# Altium PCB PCB1.PcbDoc
Units mm, origin at the board's own origin, x right, y up, seen from the top; angles counter-clockwise.
Board outline 115 x 120 mm, 2 copper layers (Top Layer, Bottom Layer); 89 components, 118 nets, 549 pads, 55 vias.
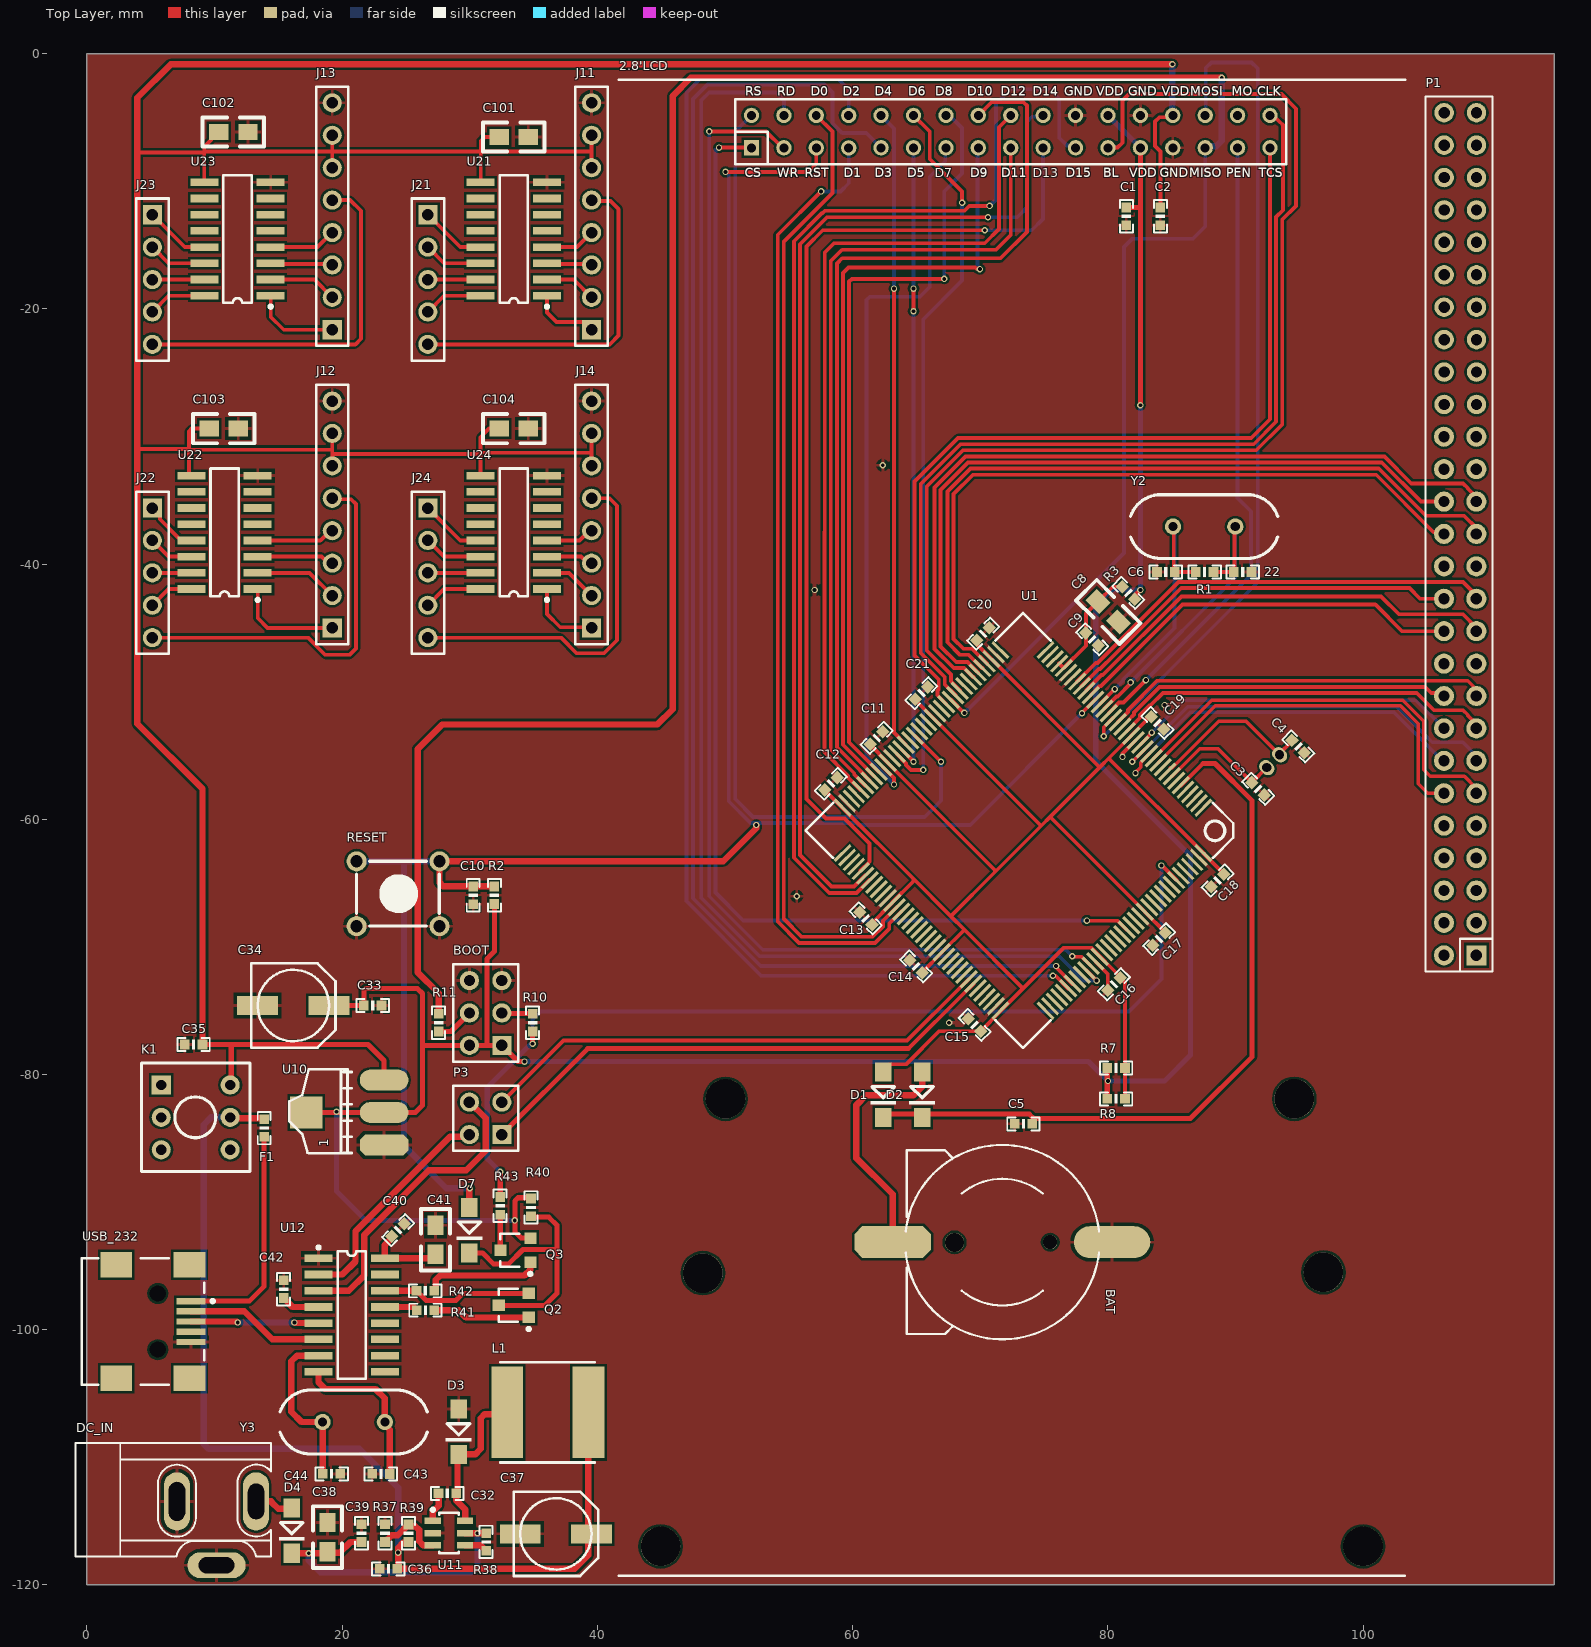
[diagram p0: Top Layer view]
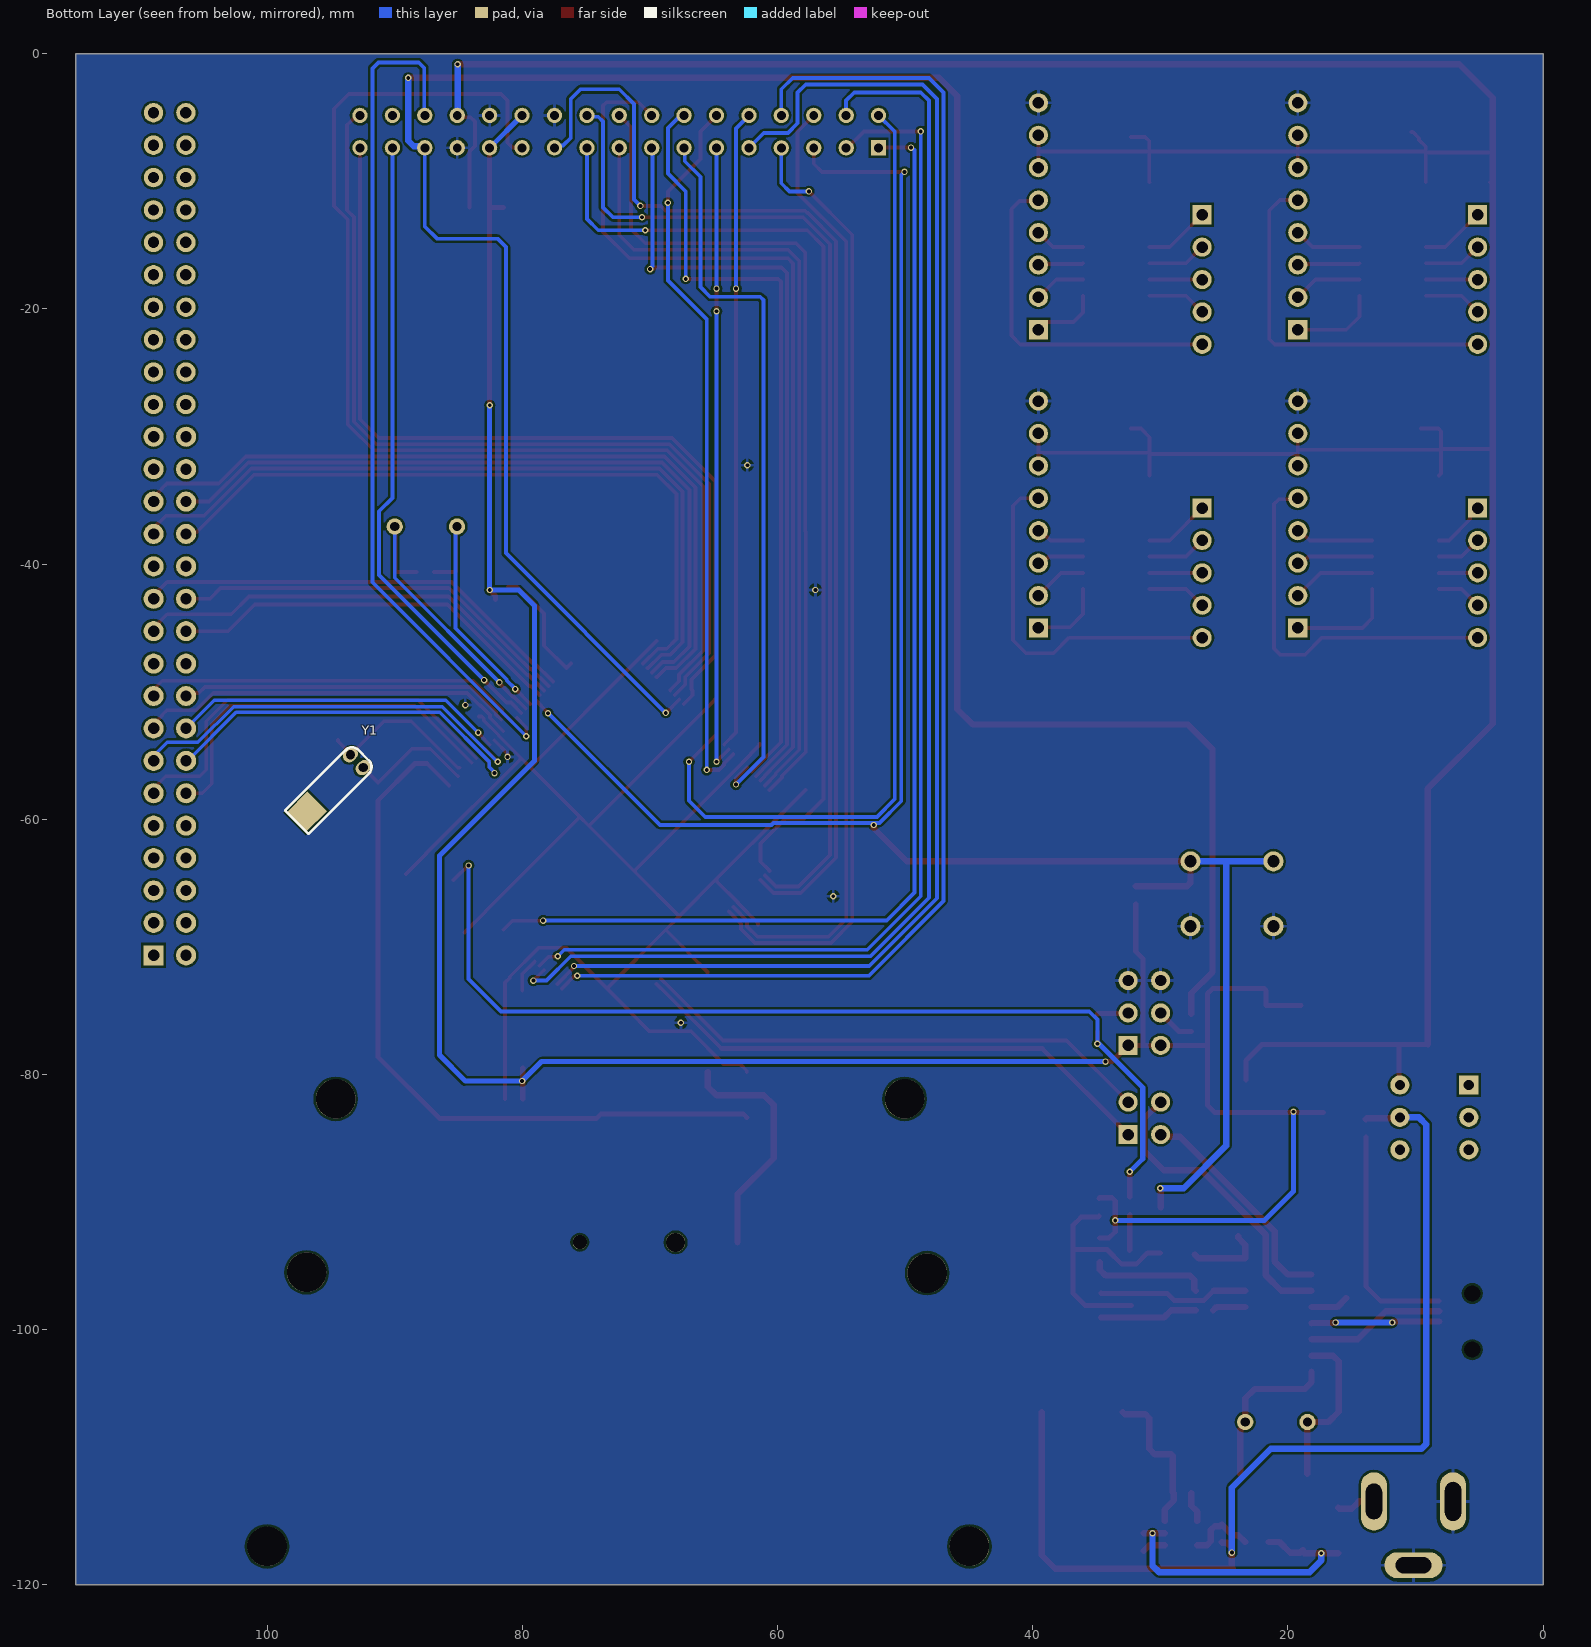
[diagram p1: Bottom Layer view, seen from below]

## Layer stack, top to bottom
Top Solder: solder mask 0.0102, Solder Resist, Dk 3.5
Top Layer: signal copper 0.0356
Dielectric 1: dielectric 0.32, FR-4, Dk 4.8
Bottom Layer: signal copper 0.0356
Bottom Solder: solder mask 0.0102, Solder Resist, Dk 3.5

## Board outline
0,-120 115,-120 115,0 0,0

## Design rules (kind name [scope] priority, off if disabled: settings)
Clearance [All] p1: gap=0.178 ignorepadtopadclearanceinfootprint=FALSE
ComponentClearance [All] p1: gap=0 collisioncheckmode=3 verticalgap=0 showdistances=FALSE
HoleSize [All] p1: absolutevalues=TRUE maxlimit=10 minlimit=0.025 maxpercent=80.000 minpercent=20.000
MinimumSolderMaskSliver [All] p1 off: minsoldermaskwidth=0.254
PolygonConnect [All] p1: connectstyle=Relief reliefconductorwidth=0.254 reliefentries=4 polygonreliefangle="90 Angle" airgapwidth=0.254
RoutingVias [All] p1: holewidth=0.3 width=0.5 viastyle="Through Hole" minholewidth=0.3 minwidth=0.5 maxholewidth=0.3 maxwidth=0.5
SilkToSilkClearance [All] p1 off: silktosilkclearance=0.254
SilkToSolderMaskClearance [IsPad] p1 off: minsilkscreentomaskgap=0.254 clearancetoexposedcopper=TRUE
SolderMaskExpansion [All] p1: expansion=0.102
Width [All] p1: maxlimit=0.5 minlimit=0.25 preferedwidth=0.3
25 further rules are at their usual default settings.

## Components (designator, comment, footprint, x,y, rotation, side; value= is the part's Value field where it differs from the comment)
2.8'LCD "TFT_LCD" db2*17-4.3 52.075,-7.39 r0 top
22 "10" 0603P 90.57,-40.62 r180 top
BAT "BATT" BATM 71.735,-93.143 r270 top
BOOT "Header 3X2" HDR2X3 32.512,-77.724 r90 top
C1 "104" 0603P 81.452,-12.752 r270 top
C2 "104" 0603P 84.119,-12.752 r270 top
C3 "10" 0603P 91.783,-57.618 r135 top
C4 "10" 0603P 94.926,-54.296 r135 top
C5 "104" 0603P 73.388,-83.87 r0 top
C6 "22" 0603P 84.538,-40.618 r0 top
C8 "10uF" 0805 80.839,-44.555 r135 top
C9 "104" 0603P 78.775,-45.901 r135 top
C10 "104" 0603P 30.271,-65.965 r270 top
C11 "104" 0603P 61.892,-53.624 r225 top
C12 "104" 0603P 58.3,-57.216 r225 top
C13 "104" 0603P 61.029,-67.765 r315 top
C14 "104" 0603P 64.98,-71.536 r315 top
C15 "104" 0603P 69.56,-76.116 r315 top
C16 "104" 0603P 80.481,-72.931 r45 top
C17 "104" 0603P 84.019,-69.393 r45 top
C18 "104" 0603P 88.607,-64.803 r45 top
C19 "104" 0603P 83.894,-52.456 r135 top
C20 "104" 0603P 70.231,-45.466 r225 top
C21 "104" 0603P 65.394,-50.121 r225 top
C32 "103" 0603P 28.239,-112.828 r0 top
C33 "104" 0603P 22.397,-74.601 r180 top
C34 "220uF" CC6.56.5 16.174,-74.601 r180 top
C35 "104" 0603P 8.351,-77.649 r0 top
C36 "104" 0603P 23.622,-118.745 r0 top
C37 "220uF" CC6.56.5 36.748,-116.003 r180 top
C38 "10uF" 0805 18.841,-117.4 r90 top
C39 "104" 0603P 21.508,-115.952 r90 top
C40 "104" 0603P 24.384,-92.202 r45 top
C41 "10uF" 0805 27.303,-94.107 r90 top
C42 "104" 0603P 15.412,-96.826 r270 top
C43 "22" 0603P 23.032,-111.304 r0 top
C44 "22" 0603P 19.171,-111.304 r180 top
C101 "0.1uF" 0805 34.589,-6.531 r180 top
C102 "0.1uF" 0805 12.618,-6.15 r180 top
C103 "0.1uF" 0805 11.856,-29.391 r180 top
C104 "0.1uF" 0805 34.589,-29.391 r180 top
D1 "1N4148" DIODE_SOP 62.402,-79.808 r270 top
D2 "1N4148" DIODE_SOP 65.45,-79.808 r270 top
D3 "SS14" DIODE_SOP 29.128,-106.224 r270 top
D4 "SS14" DIODE_SOP 16.047,-113.971 r270 top
D7 "1N4148" DIODE_SOP 29.972,-90.424 r270 top
DC_IN "POWER" DC10B 2.608,-117.781 r0 top
F1 "1000mA" 0603P 13.888,-84.202 r90 top
J11 "CON8" HDR1X8 39.542,-21.642 r90 top
J12 "CON8" HDR1X8 19.222,-45.01 r90 top
J13 "CON8" HDR1X8 19.222,-21.642 r90 top
J14 "CON8" HDR1X8 39.542,-45.01 r90 top
J21 "CON5" HDR1X5 26.715,-12.625 r270 top
J22 "CON5" HDR1X5 5.125,-35.612 r270 top
J23 "CON5" HDR1X5 5.125,-12.625 r270 top
J24 "CON5" HDR1X5 26.715,-35.612 r270 top
K1 "BUTTON" BTN8.5*8.5 5.821,-80.824 r0 top
L1 "4.7uH" L_SOP74 39.288,-106.478 r180 top
P1 "HEAD2*27" HEAD2*27 108.895,-70.675 r90 top
P3 "USART1" HDR2X2 32.512,-84.709 r90 top
Q2 "S8050" SOT-23R 33.573,-98.096 r90 top
Q3 "S8550" SOT-23R 33.7,-93.778 r90 top
R1 "1M" 0603P 87.586,-40.618 r0 top
R2 "10K" 0603P 31.922,-65.965 r90 top
R3 "10R" 0603P 81.605,-42.263 r315 top
R7 "0R" 0603P 80.645,-79.502 r0 top
R8 "0R" 0603P 80.645,-81.915 r0 top
R10 "10K" 0603P 34.925,-75.946 r90 top
R11 "10K" 0603P 27.559,-75.946 r90 top
R37 "9.53K" 0603P 23.35,-115.952 r90 top
R38 "100K" 0603P 31.287,-116.638 r270 top
R39 "49.9K" 0603P 25.191,-115.952 r270 top
R40 "10K" 0603P 34.798,-90.424 r90 top
R41 "1K" 0603P 26.525,-98.475 r0 top
R42 "1K" 0603P 26.512,-96.953 r0 top
R43 "1K" 0603P 32.385,-90.297 r270 top
RESET "KEY_M" KEY_M 21.127,-63.298 r0 top
U1 "STM32F103ZET6" LQFP144 87.49,-59.118 r225 top
U10 "AMS1117-3.3" AMS1117 23.284,-85.524 r90 top
U11 "MP2359" SOT-23-6 27.096,-114.992 r0 top
U12 "CH340G" SOP16M 20.746,-98.858 r270 top
U21 "ULN2003" SOP16M 33.446,-14.53 r90 top
U22 "ULN2003" SOP16M 10.78,-37.517 r90 top
U23 "ULN2003" SOP16M 11.796,-14.53 r90 top
U24 "ULN2003" SOP16M 33.446,-37.517 r90 top
USB_232 "USB" USB/SM0.8-6H5 0.299,-99.366 r180 top
Y1 "32.768K" XTAL32 92.458,-55.956 r315 bottom
Y2 "8MHz" XTAL_US 89.989,-37.064 r180 top
Y3 "8MHz" XTAL_US 18.46,-107.24 r0 top

## Footprints (in the part's own frame and the unit in brackets; to place one, negate y for a bottom-side part, rotate by r counter-clockwise, add the part's x,y. Pads: shape width x height; smd on the part's side, far side on the other; paste and mask are expansions set on the pad)
0603P [mil]
  rect 30x30 smd: 1(-27,0) 2(27.5,-0.06)
  silkscreen extent -50,-20 50,20
0805 [mil]
  rect 60x50 smd: 1(0,-0.06) 2(90,-0.06)
  silkscreen extent -50,-45 140,45
AMS1117 [mil]
  oct 65x150 smd: 1(0.03,-0.06)
  oval 65x150 smd: 2(100.03,-0.06) 3(200.03,-0.06)
  rect 100x100 smd: 4(100.03,239.94)
  silkscreen extent -26,100 234,293
BATM [mm]
  round 1.1 hole 1.1 unplated: 0(0,3.748)
  round 1.5 hole 1.5 unplated: 0(0.025,-3.752)
  oct 2.5x6 smd: 1(0,-8.602)
  oval 2.5x6 smd: 2(0,8.598)
  silkscreen extent -7.62,-7.58 7.62,7.57
BTN8.5*8.5 [mm]
  rect 1.5x1.5 hole 0.8: 1(0,0)
  round 1.5 hole 0.8: 2(0,-2.54) 3(0,-5.08) 4(5.4,-5.08) 5(5.4,-2.54) 6(5.4,0)
  silkscreen extent -1.55,-6.79 6.95,1.71
CC6.56.5 [mm]
  rect 3.2x1.5 smd: 1(-2.794,0) 2(2.8,0)
  silkscreen extent -3.3,-3.3 3.3,3.3
db2*17-4.3 [mm]
  rect 1.2x1.2 hole 0.7: 1(-0.002,0.006)
  round 1.2 hole 0.7: 2(-0.002,2.546) 3(2.538,0.006) 4(2.538,2.546) 5(5.08,0) 6(5.078,2.546) 7(7.62,0) 8(7.62,2.54) 9(10.158,0.006) 10(10.158,2.546) 11(12.698,0.006) 12(12.698,2.546) 13(15.238,0.006) 14(15.238,2.546) 15(17.778,0.006) 16(17.778,2.546) 17(20.318,0.006) 18(20.318,2.546) 19(22.858,0.006) 20(22.858,2.546) 21(25.398,0.006) 22(25.398,2.546) 23(27.938,0.006) 24(27.938,2.546) 25(30.478,0.006) 26(30.478,2.546) 27(33.018,0.006) 28(33.018,2.546) 29(35.558,0.006) 30(35.558,2.546) 31(38.098,0.006) 32(38.098,2.546) 33(40.638,0.006) 34(40.638,2.546)
  round 3.1 hole 3.1: ""(-7.125,-109.596) ""(-3.81,-88.18) ""(-2.037,-74.525) ""(42.54,-74.525) ""(44.82,-88.12) ""(47.925,-109.596)
  silkscreen extent -10.4,-111.89 51.25,5.33
DC10B [mil]
  oval 80x180 hole 50 slot 110 at 90 deg: 1(419.09,170)
  oval 80x180 hole 50 slot 120 at 90 deg: 2(175,170)
  oval 180x80 hole 50 slot 110 at 0 deg: 3(297.05,-26.85)
  silkscreen extent -138,0 465,350
DIODE_SOP [mm]
  rect 1.5x1.3 smd: 1(0,0) 2(3.556,0)
  silkscreen extent 1.14,-1.02 2.56,1.02
HDR1X5 [mm] "Connector; Header; 5 Position"
  rect 1.5x1.5 hole 0.9: 1(0,0)
  round 1.5 hole 0.9: 2(2.54,0) 3(5.08,0) 4(7.62,0) 5(10.16,0)
  silkscreen extent -1.27,-1.27 11.43,1.27
HDR1X8 [mm] "Connector; Header; 8 Position"
  rect 1.5x1.5 hole 0.9: 1(0,0)
  round 1.5 hole 0.9: 2(2.54,0) 3(5.08,0) 4(7.62,0) 5(10.16,0) 6(12.7,0) 7(15.24,0) 8(17.78,0)
  silkscreen extent -1.27,-1.27 19.05,1.27
HDR2X2 [mm]
  rect 1.5x1.5 hole 0.9: 1(0,0)
  round 1.5 hole 0.9: 2(0,2.54) 3(2.54,0) 4(2.54,2.54)
  silkscreen extent -1.27,-1.27 3.81,3.81
HDR2X3 [mm]
  rect 1.5x1.5 hole 0.889: 1(0,0)
  round 1.5 hole 0.889: 2(0,2.54) 3(2.54,0) 4(2.54,2.54) 5(5.08,0) 6(5.08,2.54)
  silkscreen extent -1.27,-1.27 6.35,3.81
HEAD2*27 [mil]
  rect 62x62 hole 35: 1(0.42,0.42)
  round 62 hole 35: 2(0.42,100.42) 3(100.42,0.42) 4(100.42,100.42) 5(200.42,0.42) 6(200.42,100.42) 7(300.42,0.42) 8(300.42,100.42) 9(400.42,0.42) 10(400.42,100.42) 11(500.42,0.42) 12(500.42,100.42) 13(600.42,0.42) 14(600.42,100.42) 15(700.42,0.42) 16(700.42,100.42) 17(800.42,0.42) 18(800.42,100.42) 19(900.42,0.42) 20(900.42,100.42) 21(1000.42,0.42) 22(1000.42,100.42) 23(1100.42,0.42) 24(1100.42,100.42) 25(1200.42,0.42) 26(1200.42,100.42) 27(1300.42,0.42) 28(1300.42,100.42) 29(1400.42,0.42) 30(1400.42,100.42) 31(1500.42,0.42) 32(1500.42,100.42) 33(1600.42,0.42) 34(1600.42,100.42)
  round 60 hole 35: 35(1700,0) 36(1700,100) 37(1800,0) 38(1800,100) 39(1900,0) 40(1900,100) 41(2000,0) 42(2000,100) 43(2100,0) 44(2100,100) 45(2200,0) 46(2200,100) 47(2300,0) 48(2300,100) 49(2400,0) 50(2400,100) 51(2500,0) 52(2500,100) 53(2600,0) 54(2600,100)
  silkscreen extent -50,-50 2650,157
KEY_M [mil]
  round 62 hole 38: 1(0,0) 1(255.91,0) 2(0,-200) 2(255.91,-200)
  silkscreen extent 0,-200 255,0
L_SOP74 [mm]
  rect 2.5x7.2 smd: 1(0,0) 2(6.35,0)
  silkscreen extent -0.51,-3.94 6.89,3.94
LQFP144 [mm]
  rect 1.8x0.254 smd: 1(-0.009,0.001) 2(-0.009,-0.499) 3(-0.009,-0.999) 4(-0.009,-1.499) 5(-0.009,-1.999) 6(-0.009,-2.499) 7(-0.009,-2.999) 8(-0.009,-3.499) 9(-0.009,-3.999) 10(-0.009,-4.499) 11(-0.009,-4.999) 12(-0.009,-5.499) 13(-0.009,-5.999) 14(-0.009,-6.499) 15(-0.009,-6.999) 16(-0.009,-7.499) 17(-0.009,-7.999) 18(-0.009,-8.499) 19(-0.009,-8.999) 20(-0.009,-9.499) 21(-0.009,-9.999) 22(-0.009,-10.499) 23(-0.009,-10.999) 24(-0.009,-11.499) 25(-0.009,-11.999) 26(-0.009,-12.499) 27(-0.009,-12.999) 28(-0.009,-13.499) 29(-0.009,-13.999) 30(-0.009,-14.499) 31(-0.009,-14.999) 32(-0.009,-15.499) 33(-0.009,-15.999) 34(-0.009,-16.499) 35(-0.009,-16.999) 36(-0.009,-17.499) 73(22.491,-17.499) 74(22.491,-16.999) 75(22.491,-16.499) 76(22.491,-15.999) 77(22.491,-15.499) 78(22.491,-14.999) 79(22.491,-14.499) 80(22.491,-13.999) 81(22.491,-13.499) 82(22.491,-12.999) 83(22.491,-12.499) 84(22.491,-11.999) 85(22.491,-11.499) 86(22.491,-10.999) 87(22.491,-10.499) 88(22.491,-9.999) 89(22.491,-9.499) 90(22.491,-8.999) 91(22.491,-8.499) 92(22.491,-7.999) 93(22.491,-7.499) 94(22.491,-6.999) 95(22.491,-6.499) 96(22.491,-5.999) 97(22.491,-5.499) 98(22.491,-4.999) 99(22.491,-4.499) 100(22.491,-3.999) 101(22.491,-3.499) 102(22.491,-2.999) 103(22.491,-2.499) 104(22.491,-1.999) 105(22.491,-1.499) 106(22.491,-0.999) 107(22.491,-0.499) 108(22.491,0.001)
  rect 0.254x1.8 smd: 37(2.491,-19.999) 38(2.991,-19.999) 39(3.491,-19.999) 40(3.991,-19.999) 41(4.491,-19.999) 42(4.991,-19.999) 43(5.491,-19.999) 44(5.991,-19.999) 45(6.491,-19.999) 46(6.991,-19.999) 47(7.491,-19.999) 48(7.991,-19.999) 49(8.491,-19.999) 50(8.991,-19.999) 51(9.491,-19.999) 52(9.991,-19.999) 53(10.491,-19.999) 54(10.991,-19.999) 55(11.491,-19.999) 56(11.991,-19.999) 57(12.491,-19.999) 58(12.991,-19.999) 59(13.491,-19.999) 60(13.991,-19.999) 61(14.491,-19.999) 62(14.991,-19.999) 63(15.491,-19.999) 64(15.991,-19.999) 65(16.491,-19.999) 66(16.991,-19.999) 67(17.491,-19.999) 68(17.991,-19.999) 69(18.491,-19.999) 70(18.991,-19.999) 71(19.491,-19.999) 72(19.991,-19.999) 109(19.991,2.501) 110(19.491,2.501) 111(18.991,2.501) 112(18.491,2.501) 113(17.991,2.501) 114(17.491,2.501) 115(16.991,2.501) 116(16.491,2.501) 117(15.991,2.501) 118(15.491,2.501) 119(14.991,2.501) 120(14.491,2.501) 121(13.991,2.501) 122(13.491,2.501) 123(12.991,2.501) 124(12.491,2.501) 125(11.991,2.501) 126(11.491,2.501) 127(10.991,2.501) 128(10.491,2.501) 129(9.991,2.501) 130(9.491,2.501) 131(8.991,2.501) 132(8.491,2.501) 133(7.991,2.501) 134(7.491,2.501) 135(6.991,2.501) 136(6.491,2.501) 137(5.991,2.501) 138(5.491,2.501) 139(4.991,2.501) 140(4.491,2.501) 141(3.991,2.501) 142(3.491,2.501) 143(2.991,2.501) 144(2.491,2.501)
  silkscreen extent -0.81,-20.8 23.29,3.3
SOP16M [mm]
  rect 0.6x2.2 smd: 1(-4.445,-2.6) 2(-3.175,-2.6) 3(-1.905,-2.6) 4(-0.635,-2.6) 5(0.635,-2.6) 6(1.905,-2.6) 7(3.175,-2.6) 8(4.445,-2.6) 9(4.445,2.6) 10(3.175,2.6) 11(1.905,2.6) 12(0.635,2.6) 13(-0.635,2.6) 14(-1.905,2.6) 15(-3.175,2.6) 16(-4.445,2.6)
  silkscreen extent -5.42,-2.72 5,1.1
SOT-23-6 [mil]
  rect 50x20 smd: 1(0,0) 2(0,-37.4) 3(0,-74.8) 4(100,-74.8) 5(100,-37.4) 6(100,0)
  silkscreen extent 0,-99 80,35
SOT-23R [mm]
  rect 0.9x0.95 smd: 1(0.95,-1.048) 2(-0.95,-1.048) 3(0,1.302)
  silkscreen extent -1.98,-1.17 1.3,1.3
USB/SM0.8-6H5 [mm]
  rect 2.3x0.5 smd: 1(-7.85,-1.6) 2(-7.85,-0.8) 3(-7.85,0) 4(-7.85,0.8) 5(-7.85,1.6)
  rect 2.5x2 smd: 6(-7.75,4.45) 7(-1.996,4.45) 8(-7.75,-4.45) 9(-1.996,-4.45)
  round 0.6 hole 1.27 unplated: MH1(-5.25,2.2) MH2(-5.25,-2.2)
  silkscreen extent -9.68,-4.95 0.7,4.95
XTAL32 [mil]
  oval 50x40 hole 28: 1(0,0) 2(0,-56)
  rect 92.13x86 smd: ""(220,-27)
  silkscreen extent -28,-77 264,25
XTAL_US [mil]
  round 50 hole 28: 1(0,0) 2(192.13,0)
  silkscreen extent -131,-98 323,98

## Part data
22 C3 C4 C6 C43 C44: library part C_1
BAT: library part BAT
BOOT: "Header, 3-Pin, Dual row", LatestRevisionDate=17-Jul-2002, LatestRevisionNote="Re-released for DXP Platform.", Publisher="Altium Limited"
C1 C2 C5 C9 C10 C11 C12 C13 C14 C15 C16 C17 C18 C19 C20 C21 C33 C35 C36 C39 C40 C42: library part C
C8 C38 C41 C101 C102 C103 C104: library part C_2
C32: library part C_3
C34 C37: library part CAP
D1 D2 D3 D4 D7: library part D
DC_IN: library part POW
F1 R1 R2 R10 R11 R37 R38 R39 R40 R41 R42 R43: library part R
J11 J12 J13 J14: library part "Header 8", "Header, 8-Pin", LatestRevisionDate=17-Jul-2002, LatestRevisionNote="Re-released for DXP Platform.", Publisher="Altium Limited"
J21 J22 J23 J24: library part "Header 5", "Header, 5-Pin", LatestRevisionDate=17-Jul-2002, LatestRevisionNote="Re-released for DXP Platform.", Publisher="Altium Limited"
L1: library part L_SOP
P3: library part "Header 2X2", "Header, 2-Pin, Dual row", LatestRevisionDate=17-Jul-2002, LatestRevisionNote="Re-released for DXP Platform.", Publisher="Altium Limited"
Q2: library part NPN, "8050/BCW846/BCW847"
Q3: library part PNP, "8550/BCW68"
R3: library part R_1
R7 R8: library part R_2
U10: library part AMS1117
U11: "DC DC Step Down IC"
U12: "USB2UART"
U21 U22 U23 U24: library part "Header 8X2A", "Header, 8-Pin, Dual row", LatestRevisionDate=17-Jul-2002, LatestRevisionNote="Re-released for DXP Platform.", Publisher="Altium Limited"
USB_232: library part USB5
Y1: library part XTAL_1, "Crystal Oscillator", LatestRevisionDate=17-Jul-2002, LatestRevisionNote="Re-released for DXP Platform.", Published=8-Jun-2000, Publisher="Altium Limited"
Y2 Y3: library part XTAL, "Crystal Oscillator", LatestRevisionDate=17-Jul-2002, LatestRevisionNote="Re-released for DXP Platform.", Published=8-Jun-2000, Publisher="Altium Limited"

## Via types
v1: diameter 0.5, hole 0.3, Top Layer to Bottom Layer, 55 vias

## Nets (pads, with @x,y where several pads share a name; then routed paths per layer and width w, separated by ;. In a path a pad name is that pad's centre, name@x,y a point inside that pad or via, vN(x,y) a via of type N, cw(c..) or ccw(c..) an arc to the next point about the centre after c; other vN are vias at no path point)
BOOT0: R10.1 R43.1 U1.138 | length 78
  Top Layer w0.3: v1(84.201,-63.627) 84.233,-63.627 U1.138
  Top Layer w0.4: R43.1 v1(32.385,-87.63) ; v1(34.925,-77.597) R10.1
  Bottom Layer w0.3: v1(34.925,-77.597) 34.925,-75.692 35.56,-75.057 81.661,-75.057 84.201,-72.517 v1(84.201,-63.627)
  Bottom Layer w0.4: v1(32.385,-87.63) 31.369,-86.614 31.369,-81.026 34.798,-77.597 v1(34.925,-77.597)
BOOT1: 2.8'LCD.29 R11.2 U1.48 | length 197.2
  Top Layer w0.3: U1.48 68.734,-51.664 v1(68.758,-51.664)
  Top Layer w0.5: R11.2 27.561,-73.636 25.908,-71.984 25.908,-54.508 27.838,-52.578 44.704,-52.578 45.898,-51.384 45.898,-3.327 47.32,-1.905 86.233,-1.905 86.258,-1.88 88.9,-1.88 v1(88.925,-1.905)
  Bottom Layer w0.3: v1(68.758,-51.664) 81.28,-39.141 81.28,-15.164 81.94,-14.503 86.69,-14.503 87.633,-13.561 2.8'LCD.29
  Bottom Layer w0.5: 2.8'LCD.29 87.767,-7.25 88.508,-7.25 88.925,-6.833 v1(88.925,-1.905)
CH340_D+: U12.5 USB_232.3 | length 10
  Top Layer w0.5: USB_232.3 11.736,-99.366 v1(11.811,-99.441) ; v1(16.256,-99.441) 16.296,-99.481 18.134,-99.481 U12.5
  Bottom Layer w0.5: v1(11.811,-99.441) v1(16.256,-99.441)
CH340_D-: U12.6 USB_232.2 | length 10.9
  Top Layer w0.5: USB_232.2 12.333,-98.566 14.53,-100.763 U12.6
FSMC_A10: 2.8'LCD.2 U1.56 | length 77.3
  Top Layer w0.3: U1.56 64.885,-53.455 v1(66.929,-55.499)
  Bottom Layer w0.3: 2.8'LCD.2 50.8,-6.117 50.8,-56.535 50.8,-58.42 52.197,-59.817 65.659,-59.817 66.929,-58.547 v1(66.929,-55.499)
FSMC_D0: 2.8'LCD.6 U1.85 | length 75.7
  Top Layer w0.3: 2.8'LCD.6 58.42,-6.111 58.42,-10.922 54.61,-14.732 54.61,-67.818 56.007,-69.215 61.569,-69.215 62.388,-68.395 62.388,-67.957 U1.85
FSMC_D1: 2.8'LCD.7 U1.86 | length 75.4
  Top Layer w0.3: v1(57.531,-10.795) 54.132,-14.194 54.132,-68.016 55.809,-69.693 61.766,-69.693 62.866,-68.593 62.866,-68.186 U1.86
  Bottom Layer w0.3: v1(57.531,-10.795) 59.055,-10.795 59.695,-10.155 2.8'LCD.7
FSMC_D2: 2.8'LCD.8 U1.114 | length 111.7
  Top Layer w0.3: v1(75.692,-72.263) 75.898,-72.263 U1.114
  Bottom Layer w0.3: 2.8'LCD.8 59.695,-2.799 58.801,-1.905 48.133,-1.905 46.99,-3.048 46.99,-66.421 52.832,-72.263 v1(75.692,-72.263)
FSMC_D3: 2.8'LCD.9 U1.115 | length 113.9
  Top Layer w0.3: v1(75.946,-71.501) 75.946,-71.604 U1.115
  Bottom Layer w0.3: 2.8'LCD.9 61.072,-6.223 59.182,-6.223 58.42,-5.461 58.42,-3.302 58.423,-3.299 58.423,-3.051 57.785,-2.413 48.641,-2.413 47.498,-3.556 47.498,-66.197 52.802,-71.501 v1(75.946,-71.501)
FSMC_D4: 2.8'LCD.10 U1.58 | length 50.1
  Top Layer w0.3: v1(63.246,-18.415) 63.246,-53.214 64.162,-54.13 U1.58
  Bottom Layer w0.3: 2.8'LCD.10 63.246,-5.857 v1(63.246,-18.415)
FSMC_D5: 2.8'LCD.11 U1.59 | length 49.5
  Top Layer w0.3: U1.59 64.77,-55.478 v1(64.77,-55.499) ; v1(64.77,-20.193) v1(64.77,-18.415)
  Bottom Layer w0.3: v1(64.77,-55.499) v1(64.77,-20.193) ; v1(64.77,-18.415) 64.771,-18.414 2.8'LCD.11 2.8'LCD.11
FSMC_D6: 2.8'LCD.12 U1.60 | length 56.8
  Top Layer w0.3: U1.60 63.455,-54.902 64.192,-55.64 64.192,-55.738 64.588,-56.134 v1(65.532,-56.134) ; 2.8'LCD.12 66.04,-6.111 66.04,-8.255 68.58,-10.795 v1(68.58,-11.684)
  Bottom Layer w0.3: v1(65.532,-56.134) 65.532,-20.828 68.58,-17.78 v1(68.58,-11.684)
FSMC_D7: 2.8'LCD.13 U1.63 | length 57.4
  Top Layer w0.3: U1.63 63.246,-56.782 v1(63.246,-57.277)
  Bottom Layer w0.3: v1(63.246,-57.277) 61.087,-55.118 61.087,-19.304 61.341,-19.05 65.278,-19.05 66.04,-18.288 66.04,-9.652 67.258,-8.434 67.258,-7.439 2.8'LCD.13
FSMC_D8: 2.8'LCD.14 U1.64 | length 61
  Top Layer w0.3: U1.64 62.041,-56.281 59.726,-53.967 59.726,-17.871 59.944,-17.653 v1(67.183,-17.653)
  Bottom Layer w0.3: v1(67.183,-17.653) 67.183,-10.795 68.58,-9.398 68.58,-5.842 67.564,-4.826 67.331,-4.826 2.8'LCD.14
FSMC_D9: 2.8'LCD.15 U1.65 | length 61
  Top Layer w0.3: U1.65 61.173,-56.123 61.173,-56.091 61.085,-56.003 61.085,-56.001 59.249,-54.165 59.249,-17.205 59.69,-16.764 69.596,-16.764 69.685,-16.853 69.939,-16.853 v1(69.977,-16.891)
  Bottom Layer w0.3: 2.8'LCD.15 69.78,-7.457 69.78,-16.64 69.977,-16.837 v1(69.977,-16.891)
FSMC_D10: 2.8'LCD.16 U1.66 | length 71.8
  Top Layer w0.3: U1.66 61.333,-56.96 60.607,-56.233 60.607,-56.199 58.771,-54.363 58.771,-16.454 59.182,-16.043 71.587,-16.043 73.66,-13.97 73.66,-4.064 73.406,-3.81 70.887,-3.81 2.8'LCD.16
FSMC_D11: 2.8'LCD.17 U1.67 | length 64
  Top Layer w0.3: U1.67 60.129,-56.494 60.129,-56.397 58.293,-54.561 58.293,-16.256 59.182,-15.367 71.247,-15.367 72.393,-14.221 2.8'LCD.17
FSMC_D12: 2.8'LCD.18 U1.68 | length 67
  Top Layer w0.3: U1.68 59.651,-56.723 59.651,-56.595 57.785,-54.729 57.785,-37.495 57.815,-37.465 57.815,-15.591 58.547,-14.859 70.358,-14.859 71.465,-13.752 71.465,-5.772 2.8'LCD.18
FSMC_D13: 2.8'LCD.19 U1.77 | length 77.1
  Top Layer w0.3: U1.77 60.626,-64.03 61.327,-63.329 61.327,-61.903 59.368,-59.944 57.912,-59.944 56.388,-58.42 56.388,-15.113 57.658,-13.843 v1(70.358,-13.843)
  Bottom Layer w0.3: v1(70.358,-13.843) 74.041,-13.843 74.933,-12.951 2.8'LCD.19
FSMC_D14: 2.8'LCD.20 U1.78 | length 81.5
  Top Layer w0.3: U1.78 60.117,-65.278 58.342,-65.278 55.88,-62.816 55.88,-14.945 57.998,-12.827 v1(70.612,-12.827)
  Bottom Layer w0.3: v1(70.612,-12.827) 72.898,-12.827 73.66,-12.065 73.66,-5.334 74.041,-4.953 74.824,-4.953 2.8'LCD.20
FSMC_D15: 2.8'LCD.21 U1.79 | length 90.9
  Top Layer w0.3: U1.79 60.317,-65.786 58.166,-65.786 55.402,-63.022 55.402,-14.702 57.615,-12.489 57.66,-12.489 57.831,-12.319 68.762,-12.319 69.143,-11.938 v1(70.739,-11.938)
  Bottom Layer w0.3: v1(70.739,-11.938) 71.247,-11.43 71.247,-3.937 72.39,-2.794 75.438,-2.794 76.2,-3.556 76.2,-6.604 76.808,-7.212 77.301,-7.212 2.8'LCD.21
FSMC_NE4: 2.8'LCD.1 U1.127 | length 94.6
  Top Layer w0.3: v1(49.53,-7.366) 52.055,-7.366 2.8'LCD.1 ; v1(78.359,-67.945) 78.372,-67.958 80.753,-67.958 81.453,-68.658 U1.127
  Bottom Layer w0.3: v1(49.53,-7.366) 49.476,-7.366 49.3,-7.542 49.246,-7.542 49.246,-65.756 51.435,-67.945 v1(78.359,-67.945)
FSMC_NOE: 2.8'LCD.4 U1.118 | length 105.5
  Top Layer w0.3: U1.118 78.317,-71.84 v1(79.121,-72.644)
  Bottom Layer w0.3: 2.8'LCD.4 54.613,-3.686 53.975,-3.048 48.768,-3.048 48.133,-3.683 48.133,-66.156 52.716,-70.739 76.2,-70.739 78.105,-72.644 v1(79.121,-72.644)
FSMC_NWE: 2.8'LCD.3 U1.119 | length 98.5
  Top Layer w0.3: v1(48.768,-6.096) 53.213,-6.096 54.501,-7.384 2.8'LCD.3 ; v1(77.216,-70.739) 77.254,-70.777 77.948,-70.777 U1.119
  Bottom Layer w0.3: v1(48.768,-6.096) 48.768,-66.04 52.959,-70.231 76.708,-70.231 v1(77.216,-70.739)
GND: 2.8'LCD.22 2.8'LCD.26 2.8'LCD.27 22.1 BAT.2 BOOT.5 BOOT.6 C1.2 C2.2 C3.1 C4.1 C5.1 C6.1 C8.1 C9.1 C10.2 C11.1 C12.1 C13.1 C14.1 C15.1 C16.1 C17.1 C18.1 C19.1 C20.1 C21.1 C33.1 C34.2 C35.1 C36.1 C37.2 C38.2 C39.2 C40.2 C41.2 C42.1 C43.1 C44.1 C101.1 C102.1 C103.1 C104.1 D3.1 DC_IN.2 DC_IN.3 J11.8 J12.8 J13.8 J14.8 R37.2 RESET.2 U1.16 U1.30 U1.31 U1.38 U1.51 U1.61 U1.71 U1.83 U1.94 U1.107 U1.120 U1.130 U1.143 U10.1 U11.2 U12.1 U21.8 U22.8 U23.8 U24.8 USB_232.5 | length 4.6
  Top Layer w0.3: v1(67.564,-75.946) v1@67.691,-75.946 ; U1.120 79.011,-71.137 79.996,-72.122 C16.1 ; v1(81.153,-55.118) 81.153,-54.849 U1.16
  other v1: 55.626,-66.04 84.455,-51.054 57.023,-42.037 62.357,-32.258
INT11: J11.1 U21.1 | length 5.4
  Top Layer w0.3: U21.1 36.046,-20.298 36.79,-21.042 38.942,-21.042 J11.1
INT12: J11.2 U21.2 | length 4.1
  Top Layer w0.3: U21.2 38.145,-17.705 J11.2
INT13: J11.3 U21.3 | length 3.5
  Top Layer w0.3: U21.3 36.109,-16.498 39.479,-16.498 J11.3
INT14: J11.4 U21.4 | length 4
  Top Layer w0.3: U21.4 38.399,-15.165 J11.4
INT21: J12.1 U22.1 | length 8.4
  Top Layer w0.3: U22.1 13.38,-44.241 14.149,-45.01 J12.1
INT22: J12.2 U22.2 | length 6.6
  Top Layer w0.3: U22.2 17.444,-40.692 J12.2
INT23: J12.3 U22.3 | length 6.1
  Top Layer w0.3: U22.3 18.389,-39.422 18.897,-39.93 J12.3
INT24: J12.4 U22.4 | length 6.2
  Top Layer w0.3: U22.4 18.287,-38.152 19.049,-37.39 J12.4
INT31: J13.1 U23.1 | length 6.9
  Top Layer w0.3: U23.1 14.396,-20.619 15.419,-21.642 J13.1
INT32: J13.2 U23.2 | length 5.4
  Top Layer w0.3: U23.2 17.825,-17.705 J13.2
INT33: J13.3 U23.3 | length 4.9
  Top Layer w0.3: U23.3 14.46,-16.498 19.159,-16.498 J13.3
INT34: J13.4 U23.4 | length 5.3
  Top Layer w0.3: U23.4 18.079,-15.165 J13.4
INT41: J14.1 U24.1 | length 5.9
  Top Layer w0.3: U24.1 36.046,-43.92 37.084,-44.958 39.49,-44.958 J14.1
INT42: J14.2 U24.2 | length 4.2
  Top Layer w0.3: U24.2 37.764,-40.692 J14.2
INT43: J14.3 U24.3 | length 3.7
  Top Layer w0.3: U24.3 38.709,-39.422 39.217,-39.93 J14.3
INT44: J14.4 U24.4 | length 3.8
  Top Layer w0.3: U24.4 38.607,-38.152 39.369,-37.39 J14.4
LCD_BL: 2.8'LCD.23 U1.46 | length 91
  Top Layer w0.3: U1.46 68.404,-49.887 67.701,-49.184 67.701,-48.651 65.816,-46.766 65.816,-33.92 68.647,-31.089 91.634,-31.089 93.669,-29.054 93.669,-13.011 94.742,-11.938 94.742,-4.318 93.599,-3.175 81.661,-3.175 81.153,-3.683 81.153,-6.985 80.772,-7.366 80.031,-7.366 2.8'LCD.23
Net22_2: 22.2 R1.2 U1.23 Y2.1 | length 23.8
  Top Layer w0.3: U1.23 80.669,-50.383 80.779,-50.383 81.788,-49.374 v1(81.788,-49.276) ; R1.2@88.285,-40.619 22.2 ; 22.2 89.931,-40.56 89.931,-37.123 Y2.1
  Bottom Layer w0.3: v1(81.788,-49.276) 89.989,-41.075 Y2.1
NetBAT_1: BAT.1 D2.1 | length 18.8
  Top Layer w0.5: BAT.1 63.133,-89.397 60.3,-86.563 60.3,-82.398 61.062,-81.636 64.77,-81.636 65.45,-80.956 D2.1
NetBOOT_3: BOOT.3 R10.2 | length 2.4
  Top Layer w0.4: BOOT.3 32.544,-75.216 34.895,-75.216 R10.2
NetBOOT_4: BOOT.4 R11.1 | length 3
  Top Layer w0.4: R11.1 28.524,-76.632 BOOT.4
NetC3_2: C3.2 U1.8 Y1.1 | length 9.9
  Top Layer w0.3: U1.8 85.054,-56.637 87.208,-54.483 88.646,-54.483 91.286,-57.123 C3.2 Y1.1
NetC4_2: C4.2 U1.9 Y1.2 | length 12.7
  Top Layer w0.3: U1.9@84.922,-55.966 85.05,-55.966 88.692,-52.324 90.838,-52.324 Y1.2 93.464,-54.86 94.434,-53.89 C4.2
NetC5_2: C5.2 D1.2 D2.2 U1.6 | length 58.7
  Top Layer w0.3: U1.6 86.586,-56.487 86.591,-56.487 87.452,-55.626
  Top Layer w0.4: D1.2 62.654,-83.112 73.841,-83.112 74.168,-83.439 86.487,-83.439 91.313,-78.613 91.313,-58.547 88.392,-55.626 87.452,-55.626
NetC6_2: C6.2 R1.1 U1.24 Y2.2 | length 21.7
  Top Layer w0.3: U1.24 v1(80.54,-49.806) ; Y2.2 85.173,-37.128 85.173,-40.557 C6.2 ; C6.2@85.237,-40.619 R1.1
  Bottom Layer w0.3: v1(80.54,-49.806) 81.21,-49.135 81.21,-49.037 85.217,-45.03 85.217,-37.172 Y2.2
NetC32_1: C32.1 U11.1 | length 2.4
  Top Layer w0.5: U11.1 27.096,-114.255 27.559,-113.792 27.559,-112.834 C32.1
NetC32_2: C32.2 D3.2 L1.2 U11.6 | length 12.2
  Top Layer w0.5: U11.6 29.636,-114.091 28.938,-113.393 C32.2 29.033,-112.734 29.033,-109.875 D3.2 30.428,-109.78 30.861,-109.347 30.861,-106.934 31.154,-106.641 32.775,-106.641 L1.2
NetC38_1: C38.1 C39.1 D4.2 R38.1 U11.5 | length 24.6
  Top Layer w0.5: D4.2 v1(17.381,-117.527) 18.716,-117.527 C38.1 18.843,-117.273 19.045,-117.475 19.812,-117.475 20.649,-116.638 C39.1 ; U11.5 29.64,-115.946 31.281,-115.946 R38.1
  Bottom Layer w0.5: v1(17.381,-117.527) 17.381,-118.092 18.288,-118.999 30.099,-118.999 30.607,-118.491 v1(30.607,-115.951)
NetC42_2: C42.2 U12.4 | length 3
  Top Layer w0.5: C42.2 16.109,-98.223 U12.4
NetC43_2: C43.2 U12.8 Y3.2 | length 12.6
  Top Layer w0.5: U12.8 18.146,-104.125 18.669,-104.648 22.606,-104.648 23.34,-105.382 Y3.2 23.34,-107.448 23.731,-107.839 C43.2
NetC44_2: C44.2 U12.7 Y3.1 | length 13.1
  Top Layer w0.5: U12.7 16.458,-102.033 16.002,-102.489 16.002,-106.426 16.816,-107.24 Y3.1 18.466,-107.246 18.466,-111.296 C44.2
NetD4_1: D4.1 DC_IN.1 | length 3.1
  Top Layer w0.5: DC_IN.1 14.446,-113.463 14.446,-113.506 14.986,-114.046 15.972,-114.046 D4.1
NetD7_2: D7.2 Q2.3 R40.1 | length 20.3
  Top Layer w0.4: D7.2 30.988,-93.98 31.877,-94.869 33.02,-94.869 34.163,-93.726 36.83,-93.726 ; Q2.3 35.889,-98.096 36.83,-97.155 36.83,-93.726 ; R40.1 34.874,-91.186 36.195,-91.186 36.83,-91.821 36.83,-93.726
NetQ2_1: Q2.1 R42.1 U12.14 | length 11.8
  Top Layer w0.4: R42.1 26.586,-97.713 28.906,-97.713 29.464,-97.155 34.612,-97.155 Q2.1
  Top Layer w0.5: U12.14 R42.1
NetQ2_2: Q2.2 R41.2 | length 7.6
  Top Layer w0.5: R41.2 29.135,-98.477 29.704,-99.046 Q2.2
NetQ3_2: Q3.2 R42.2 | length 9.2
  Top Layer w0.5: R42.2 27.341,-96.824 27.341,-96.103 27.686,-95.758 34.29,-95.758 34.734,-95.314 34.734,-94.742 Q3.2
NetQ3_3: Q3.3 R43.2 | length 2.8
  Top Layer w0.4: R43.2 32.391,-91.003 32.391,-93.771 Q3.3
NetR37_1: R37.1 R39.1 U11.3 | length 5.5
  Top Layer w0.5: R37.1 23.883,-116.105 24.353,-116.105 R39.1 25.322,-115.397 25.734,-115.397 26.033,-115.697 26.033,-116.584 26.337,-116.888 27.092,-116.888 U11.3 U11.3@27.092,-116.896
NetR38_2: R38.2 U11.4 | length 1.8
  Top Layer w0.5: U11.4 30.841,-116.892 R38.2
NetR41_1: R41.1 U12.13 | length 2.6
  Top Layer w0.5: U12.13 25.586,-98.223 R41.1
OUT11: J21.4 U21.16 | length 4.7
  Top Layer w0.3: J21.4 27.985,-18.975 U21.16
OUT12: J21.3 U21.15 | length 4.1
  Top Layer w0.3: J21.3 U21.15
OUT13: J21.2 U21.14 | length 4.7
  Top Layer w0.3: J21.2 27.985,-16.435 U21.14
OUT14: J21.1 U21.13 | length 5.2
  Top Layer w0.3: J21.1 29.255,-15.165 U21.13
OUT21: J22.4 U22.16 | length 3.6
  Top Layer w0.3: J22.4 6.395,-41.962 U22.16
OUT22: J22.3 U22.15 | length 3.1
  Top Layer w0.3: J22.3 U22.15
OUT23: J22.2 U22.14 | length 3.6
  Top Layer w0.3: J22.2 6.395,-39.422 U22.14
OUT24: J22.1 U22.13 | length 4.3
  Top Layer w0.3: J22.1 5.725,-36.212 5.725,-36.497 7.38,-38.152 U22.13
OUT31: J23.4 U23.16 | length 4.6
  Top Layer w0.3: J23.4 6.395,-18.975 U23.16
OUT32: J23.3 U23.15 | length 4.1
  Top Layer w0.3: J23.3 U23.15
OUT33: J23.2 U23.14 | length 4.6
  Top Layer w0.3: J23.2 6.395,-16.435 U23.14
OUT34: J23.1 U23.13 | length 5.1
  Top Layer w0.3: J23.1 7.665,-15.165 U23.13
OUT41: J24.4 U24.16 | length 4.7
  Top Layer w0.3: J24.4 27.985,-41.962 U24.16
OUT42: J24.3 U24.15 | length 4.1
  Top Layer w0.3: J24.3 U24.15
OUT43: J24.2 U24.14 | length 4.7
  Top Layer w0.3: J24.2 27.985,-39.422 U24.14
OUT44: J24.1 U24.13 | length 5.2
  Top Layer w0.3: J24.1 29.255,-38.152 U24.13
PA4: P1.28 U1.40 | length 55.7
  Top Layer w0.3: U1.40 69.366,-46.639 68.677,-46.639 67.915,-45.877 67.915,-34.524 69.438,-33 101.032,-33 105.537,-37.506 106.206,-37.506 P1.28
PA5: P1.27 U1.41 | length 60
  Top Layer w0.3: U1.41 70.141,-48.152 69.106,-47.117 68.423,-47.117 67.437,-46.131 67.437,-34.326 69.24,-32.523 101.23,-32.523 104.926,-36.219 107.926,-36.219 108.884,-37.177 P1.27
PA6: P1.30 U1.42 | length 57.6
  Top Layer w0.3: U1.42 68.994,-47.681 68.128,-47.681 66.899,-46.452 66.899,-34.188 69.042,-32.045 101.473,-32.045 104.532,-35.104 P1.30
PA7: P1.29 U1.43 | length 61.8
  Top Layer w0.3: U1.43 69.433,-48.859 68.732,-48.159 67.93,-48.159 66.421,-46.65 66.421,-33.99 68.845,-31.567 101.671,-31.567 103.783,-33.679 107.847,-33.679 108.204,-34.036 108.204,-34.079 108.884,-34.759 P1.29
PA9: P3.3 U1.101 | length 40.6
  Top Layer w0.3: P3.3 37.338,-77.343 64.277,-77.343 68.496,-73.124 68.503,-73.124 69.079,-72.547 U1.101
PA10: P3.1 U1.102 | length 41.8
  Top Layer w0.3: 64.388,-77.978 68.715,-73.651 U1.102
  Top Layer w0.4: P3.1 39.243,-77.978 64.388,-77.978
PC0: P1.22 U1.26 | length 31.5
  Top Layer w0.3: U1.26 78.658,-50.242 79.327,-49.573 79.459,-49.573 85.852,-43.18 100.965,-43.18 103.049,-45.264 P1.22
PC1: P1.21 U1.27 | length 34.9
  Top Layer w0.3: U1.27 79.516,-48.708 79.603,-48.708 85.766,-42.545 101.409,-42.545 102.806,-43.942 107.823,-43.942 108.884,-45.003 P1.21
PC2: P1.24 U1.28 | length 31.9
  Top Layer w0.3: U1.28 79.287,-48.23 79.381,-48.23 79.859,-47.752 79.883,-47.752 85.755,-41.88 103.632,-41.88 104.476,-42.724 P1.24
PC3: P1.23 U1.29 | length 35.2
  Top Layer w0.3: U1.29 79.058,-47.752 79.183,-47.752 85.533,-41.402 107.823,-41.402 108.884,-42.463 P1.23
PF0: U1.10
PF1: P1.12 U1.11 | length 29.8
  Top Layer w0.27: U1.11 88.417,-51.121 102.939,-51.121 104.327,-52.509 104.327,-57.21 105.081,-57.964 P1.12
PF2: P1.11 U1.12 | length 32.6
  Top Layer w0.27: U1.12 88.157,-50.673 103.124,-50.673 104.775,-52.324 104.775,-56.134 105.283,-56.642 107.95,-56.642 108.884,-57.576 P1.11
PF3: P1.14 U1.13 | length 30
  Top Layer w0.27: v1(82.169,-56.388) 82.169,-56.326 82.568,-55.927 82.568,-55.566 83.254,-54.881 U1.13
  Bottom Layer w0.27: v1(82.169,-56.388) 82.169,-56.326 82.566,-55.929 82.566,-55.515 86.452,-51.629 102.431,-51.629 106.226,-55.424 P1.14
PF4: P1.13 U1.14 | length 32.1
  Top Layer w0.27: v1(81.915,-55.499) 81.917,-55.499 U1.14
  Bottom Layer w0.27: v1(81.915,-55.499) 81.949,-55.499 86.267,-51.181 102.616,-51.181 105.419,-53.984 107.832,-53.984 108.884,-55.036 P1.13
PF5: P1.16 U1.15 | length 26.2
  Top Layer w0.27: U1.15 82.547,-54.151 v1@83.335,-53.363 ; v1@83.341,-53.369 83.439,-53.27 v1(83.439,-53.213)
  Bottom Layer w0.27: v1(83.439,-53.213) 85.979,-50.673 104.14,-50.673 106.344,-52.877 P1.16
PF6: P1.15 U1.18 | length 30.2
  Top Layer w0.3: U1.18 82.534,-52.054 82.534,-51.825 83.265,-51.095 83.328,-51.095 84.318,-50.105 104.207,-50.105 105.561,-51.459 107.847,-51.459 108.204,-51.816 108.204,-51.859 108.884,-52.539 P1.15
PF7: P1.18 U1.19 | length 26.2
  Top Layer w0.3: U1.19@81.646,-52.202 82.056,-51.792 82.056,-51.628 84.057,-49.627 104.872,-49.627 105.345,-50.1 106.1,-50.1 P1.18
PF8: P1.17 U1.20 | length 30.3
  Top Layer w0.3: U1.20 U1.20 81.579,-51.594 81.579,-51.43 83.859,-49.149 108.204,-49.149 108.64,-49.585 108.64,-50.1 P1.17
RESET: 2.8'LCD.5 C10.1 D7.1 R2.2 RESET.1 U1.25 | length 160.7
  Top Layer w0.3: v1(50.038,-9.271) 56.515,-9.271 57.15,-8.636 57.15,-7.395 2.8'LCD.5 ; v1(77.978,-51.689) 77.978,-51.66 U1.25
  Top Layer w0.5: D7.1 29.972,-88.951 v1(29.997,-88.925) ; R2.2 27.928,-65.266 27.627,-64.965 27.627,-63.298 49.859,-63.298 52.451,-60.706 v1(52.451,-60.452)
  Bottom Layer w0.3: v1(50.038,-9.271) 50.292,-9.525 50.292,-58.588 51.999,-60.295 60.295,-60.295 60.452,-60.452 69.215,-60.452 v1(77.978,-51.689)
  Bottom Layer w0.5: RESET.1@21.127,-63.298 27.627,-63.298 RESET.1@27.527,-63.398 ; 24.841,-63.398 24.841,-85.598 28.169,-88.925 v1(29.997,-88.925)
RXD: P3.4 U12.3 | length 23.8
  Top Layer w0.5: U12.3 20.522,-96.953 21.717,-95.758 21.717,-92.583 26.797,-87.503 29.718,-87.503 31.242,-85.979 31.242,-83.439 P3.4
T_CS: 2.8'LCD.33 U1.49 | length 69.7
  Top Layer w0.3: U1.49 67.338,-50.981 66.643,-50.286 66.643,-49.925 66.746,-49.823 66.746,-49.047 64.861,-47.162 64.861,-33.524 68.251,-30.134 91.238,-30.134 92.713,-28.658 2.8'LCD.33
T_MOSI: 2.8'LCD.30 U1.21 | length 67.3
  Top Layer w0.3: v1(79.68,-53.492) 79.68,-52.787 U1.21
  Bottom Layer w0.3: v1(79.68,-53.492) 91.745,-41.427 91.745,-35.803 91.745,-1.168 91.262,-0.686 88.113,-0.686 87.681,-1.118 87.681,-4.796 2.8'LCD.30
T_PEN: 2.8'LCD.31 U1.22 | length 49.5
  Top Layer w0.3: U1.22 80.072,-51.678 80.889,-50.861 81.219,-50.861 v1(82.982,-49.098)
  Bottom Layer w0.3: v1(82.982,-49.098) 91.211,-40.869 91.211,-35.865 90.173,-34.826 2.8'LCD.31
T_SCK: 2.8'LCD.34 U1.47 | length 72.4
  Top Layer w0.3: U1.47 68.051,-50.271 67.224,-49.444 67.224,-48.849 65.338,-46.964 65.338,-33.722 68.449,-30.611 91.436,-30.611 93.191,-28.856 93.191,-12.813 93.726,-12.278 93.726,-5.588 93.514,-5.376 93.488,-5.376 92.957,-4.844 2.8'LCD.34
TXD: P3.2 U12.2 | length 17.8
  Top Layer w0.5: U12.2 20.014,-95.683 21.039,-94.658 21.039,-92.302 28.472,-84.869 29.812,-84.869 P3.2
VBTN: C36.2 C37.1 F1.2 K1.5 L1.1 R39.2 | length 81.2
  Top Layer w0.5: K1.5 11.291,-83.434 13.82,-83.434 F1.2 ; C36.2@24.303,-118.745 24.384,-118.664 v1(24.384,-117.475) 24.384,-117.094 24.765,-116.713 25.127,-116.713 R39.2 ; C36.2@24.429,-118.797 24.371,-118.797 C36.2 38.225,-118.747 39.288,-117.684 L1.1
  Bottom Layer w0.5: K1.5 11.215,-83.37 9.721,-83.37 9.144,-83.947 9.144,-108.966 9.525,-109.347 21.336,-109.347 24.384,-112.395 v1(24.384,-117.475)
VCC: C40.1 C41.1 U12.16 | length 6
  Top Layer w0.5: C40.1 23.899,-92.81 23.346,-93.363 U12.16 26.999,-94.413 C41.1
VCC3.3: 2.8'LCD.24 2.8'LCD.25 BOOT.1 BOOT.2 C1.1 C33.2 C34.1 Q3.1 R2.1 R3.2 R7.1 R8.1 R40.2 U10.2 U10.4 | length 211.7
  Top Layer w0.4: U10.4 U10.2 25.729,-82.983 26.289,-82.423 26.289,-77.724 ; C34.1 18.97,-74.599 C33.2 21.699,-73.424 21.844,-73.279 25.908,-73.279 26.289,-73.66 26.289,-77.724 ; R2.1 31.922,-70.364 31.344,-70.942 31.344,-77.622 31.242,-77.724 ; v1(34.29,-78.994) 33.782,-78.994 BOOT.1 31.242,-77.724 ; Q3.1 34.027,-92.828 33.528,-92.329 v1(33.528,-91.44) 33.528,-89.916 33.782,-89.662 34.736,-89.662 R40.2 ; R8.1 R7.1 ; C1.1 82.549,-12.066 82.55,-12.065 ; R3.2 82.098,-42.516 82.55,-42.064 v1(82.55,-42.037) ; v1(82.55,-27.559) 82.55,-12.065 ; 2.8'LCD.25 82.55,-7.387 82.55,-12.065 ; 26.289,-77.724 BOOT.2 31.242,-77.724
  Bottom Layer w0.4: v1(19.558,-82.931) 19.558,-89.154 21.844,-91.44 v1(33.528,-91.44) ; v1(34.29,-78.994) 78.486,-78.994 v1(80.01,-80.518) 84.455,-80.518 86.487,-78.486 86.487,-62.865 79.052,-55.43 79.052,-43.249 80.264,-42.037 v1(82.55,-42.037) v1(82.55,-27.559) ; 2.8'LCD.24 2.8'LCD.25
VCC3.3M: C11.2 C12.2 C13.2 C14.2 C15.2 C16.2 C17.2 C18.2 C19.2 C20.2 C21.2 D1.1 R7.2 R8.2 U1.17 U1.39 U1.52 U1.62 U1.72 U1.84 U1.95 U1.108 U1.121 U1.131 U1.144 | length 155.2
  Top Layer w0.3: C12.2 57.807,-57.709 59.21,-59.112 U1.72 64.756,-64.657 ; C11.2 61.397,-54.194 62.748,-55.544 U1.62 71.14,-63.969 71.14,-64.155 ; C13.2 61.522,-68.148 63.101,-66.568 U1.84 64.756,-64.882 64.756,-64.657 ; D1.1 62.402,-79.708 62.902,-79.208 64.186,-79.208 66.783,-76.611 C15.2 70.053,-76.584 71.586,-75.05 U1.108 73.431,-73.177 ; C21.2 64.899,-50.636 66.283,-52.02 U1.52 74.714,-60.472 74.823,-60.472 ; C14.2 65.473,-71.976 66.99,-70.459 U1.95 68.757,-68.659 68.757,-68.657 ; C20.2@69.479,-46.034 69.479,-46.04 70.879,-47.44 U1.39 79.334,-55.9 79.395,-55.9 ; R8.2 R7.2 81.343,-72.806 C16.2 80.976,-72.34 78.715,-70.079 76.53,-70.079 73.431,-73.177 ; C19.2 83.167,-51.961 83.012,-52.116 83.012,-52.252 81.839,-53.424 U1.17 80.157,-55.138 ; C17.2 84.514,-68.879 82.9,-67.265 U1.131 75.493,-59.837 75.458,-59.837 ; C18.2 89.102,-64.282 87.496,-62.676 U1.144 80.157,-55.308 80.157,-55.138 ; 64.756,-64.657 67.677,-67.578 ; 67.677,-67.578 68.757,-68.657 ; 67.677,-67.578 67.717,-67.578 71.14,-64.155 ; 68.757,-68.657 73.277,-73.177 73.431,-73.177 ; 71.14,-64.155 74.823,-60.472 ; 74.823,-60.472 75.458,-59.837 ; 75.458,-59.837 79.395,-55.9 ; 79.395,-55.9 80.157,-55.138
VCC5: 2.8'LCD.28 C2.1 C35.2 C101.2 C102.2 C103.2 C104.2 J11.6 J11.7 J12.6 J12.7 J13.6 J13.7 J14.6 J14.7 K1.6 U10.3 U21.9 U22.9 U23.9 U24.9 | length 291.8
  Top Layer w0.3: 3.947,-30.988 8.001,-30.988 ; 3.947,-10.302 4.164,-10.085 ; 3.947,-7.544 4.15,-7.747 9.196,-7.747 ; U22.9 8.151,-33.072 8.001,-32.922 8.001,-30.988 ; U23.9 9.196,-7.747 ; C103.2 8.203,-29.389 8.001,-29.591 8.001,-30.988 ; C102.2 10.205,-6.148 9.72,-6.633 9.72,-6.76 9.196,-7.284 9.196,-7.747 ; J12.6 19.222,-31.369 ; J13.6 19.222,-7.672 ; J13.7 19.222,-7.672 ; J12.7@19.401,-29.591 J12.7 19.222,-31.04 ; U24.9 30.846,-31.369 19.222,-31.369 ; U21.9 30.861,-10.07 30.861,-7.672 ; C104.2 31.519,-29.389 30.846,-30.061 30.846,-31.287 39.46,-31.287 39.542,-31.369 ; C101.2 31.19,-6.529 30.861,-6.858 30.861,-7.672 ; J14.6 39.542,-31.369 ; J14.7 39.542,-31.369 ; J11.6 39.542,-7.672 ; J11.7 39.542,-7.672 ; C2.1 84.119,-7.665 83.693,-7.239 83.693,-5.334 84.043,-4.984 84.953,-4.984 2.8'LCD.28 ; 8.001,-30.988 8.053,-31.04 19.222,-31.04 ; 9.196,-7.747 9.271,-7.672 18.669,-7.672 19.222,-7.672 ; 19.222,-31.369 19.222,-31.04 ; 19.222,-7.672 30.861,-7.672 ; 30.861,-7.672 39.542,-7.672
  Top Layer w0.4: C35.2 11.303,-77.651 ; K1.6 11.303,-80.742 11.303,-77.651 ; U10.3 23.286,-78.912 22.025,-77.651 11.303,-77.651
  Top Layer w0.5: C35.2 9.049,-57.614 3.947,-52.512 3.947,-30.988 3.947,-10.302 3.947,-7.544 3.947,-3.47 6.579,-0.838 v1(85.065,-0.838)
  Bottom Layer w0.5: v1(85.065,-0.838) 85.065,-4.816 2.8'LCD.28
VDDA: C8.2 C9.2 R3.1 U1.32 U1.33 | length 9.2
  Top Layer w0.3: U1.33 U1.32 78.282,-46.406 C9.2 78.282,-43.879 C8.2 80.383,-41.778 R3.1
VM1: J11.5 J21.5 | length 27.5
  Top Layer w0.3: J21.5 40.969,-22.785 41.656,-22.098 41.656,-12.192 41.021,-11.557 39.617,-11.557 J11.5
VM2: J12.5 J22.5 | length 30.1
  Top Layer w0.3: J22.5 17.324,-45.772 18.669,-47.117 20.574,-47.117 21.082,-46.609 21.082,-35.306 20.701,-34.925 19.297,-34.925 J12.5
VM3: J13.5 J23.5 | length 29.1
  Top Layer w0.3: J23.5 21.03,-22.785 21.463,-22.352 21.463,-12.319 20.626,-11.482 J13.5
VM4: J14.5 J24.5 | length 28.5
  Top Layer w0.3: J24.5 37.136,-45.772 38.354,-46.99 40.513,-46.99 41.529,-45.974 41.529,-35.433 40.946,-34.85 J14.5
VUSB: F1.1 USB_232.1 | length 17.9
  Top Layer w0.4: USB_232.1 12.724,-97.766 13.888,-96.602 F1.1
pads on no net: 2.8'LCD. 2.8'LCD.32 BAT.0 K1.1 K1.2 K1.3 K1.4 P1.1 P1.2 P1.3 P1.4 P1.5 P1.6 P1.7 P1.8 P1.9 P1.10 P1.19 P1.20 P1.25 P1.26 P1.31 P1.32 P1.33 P1.34 P1.35 P1.36 P1.37 P1.38 P1.39 P1.40 P1.41 P1.42 P1.43 P1.44 P1.45 P1.46 P1.47 P1.48 P1.49 P1.50 P1.51 P1.52 P1.53 P1.54 U1.1 U1.2 U1.3 U1.4 U1.5 U1.7 U1.34 U1.35 U1.36 U1.37 U1.44 U1.45 U1.50 U1.53 U1.54 U1.55 U1.57 U1.69 U1.70 U1.73 U1.74 U1.75 U1.76 U1.80 U1.81 U1.82 U1.87 U1.88 U1.89 U1.90 U1.91 U1.92 U1.93 U1.96 U1.97 U1.98 U1.99 U1.100 U1.103 U1.104 U1.105 U1.106 U1.109 U1.110 U1.111 U1.112 U1.113 U1.116 U1.117 U1.122 U1.123 U1.124 U1.125 U1.126 U1.128 U1.129 U1.132 U1.133 U1.134 U1.135 U1.136 U1.137 U1.139 U1.140 U1.141 U1.142 U12.9 U12.10 U12.11 U12.12 U12.15 U21.5 U21.6 U21.7 U21.10 U21.11 U21.12 U22.5 U22.6 U22.7 U22.10 U22.11 U22.12 U23.5 U23.6 U23.7 U23.10 U23.11 U23.12 U24.5 U24.6 U24.7 U24.10 U24.11 U24.12 USB_232.4 USB_232.6 USB_232.7 USB_232.8 USB_232.9 USB_232.MH1 USB_232.MH2 Y1.

## Polygon pours and split planes (outlines as drawn)
GND on Top Layer "Top Layer-No Net" (solid, pour order 8): 0,0 115,0 115,-120 0,-120
GND on Bottom Layer "Top Layer-No Net" (solid, pour order 10): 0,0 115,0 115,-120 0,-120

## Silkscreen, mask and mechanical layers (free items; w line width, h text height)
Mechanical 1:
  the board outline again, w0.254

## Text inside footprints (layer, text, board x,y; h text height)
2.8'LCD: Top Overlay "D7" at 66.426,-9.676 h0.71; Top Overlay "BL" at 79.634,-9.676 h0.71; Top Overlay "MISO" at 86.365,-9.676 h0.71; Top Overlay "TCS" at 91.826,-9.676 h0.71; Top Overlay "MO" at 89.725,-3.29 h0.71; Top Overlay "MOSI" at 86.475,-3.29 h0.71; Top Overlay "CLK" at 91.725,-3.29 h0.71; Top Overlay "PEN" at 89.286,-9.676 h0.71; Top Overlay "D11" at 71.633,-9.676 h0.71; Top Overlay "GND" at 84.079,-9.676 h0.71; Top Overlay "GND" at 76.6,-3.29 h0.71; Top Overlay "RD" at 54.1,-3.29 h0.71; Top Overlay "D0" at 56.725,-3.29 h0.71; Top Overlay "D10" at 68.975,-3.29 h0.71; Top Overlay "VDD" at 79.1,-3.29 h0.71; Top Overlay "GND" at 81.6,-3.29 h0.71; Top Overlay "VDD" at 84.225,-3.29 h0.71; Top Overlay "VDD" at 81.666,-9.676 h0.71; Top Overlay "D15" at 76.713,-9.676 h0.71; Top Overlay "D12" at 71.6,-3.29 h0.71; Top Overlay "D13" at 74.1,-9.686 h0.71; Top Overlay "D9" at 69.22,-9.676 h0.71; Top Overlay "D8" at 66.475,-3.29 h0.71; Top Overlay "D6" at 64.35,-3.29 h0.71; Top Overlay "D5" at 64.267,-9.676 h0.71; Top Overlay "D4" at 61.725,-3.29 h0.71; Top Overlay "D3" at 61.727,-9.676 h0.71; Top Overlay "D2" at 59.225,-3.29 h0.71; Top Overlay "D1" at 59.314,-9.676 h0.71; Top Overlay "RST" at 56.266,-9.676 h0.71; Top Overlay "WR" at 54.107,-9.676 h0.71; Top Overlay "CS" at 51.567,-9.676 h0.71; Top Overlay "RS" at 51.6,-3.29 h0.71; Top Overlay "D14" at 74.1,-3.29 h0.71; Top Overlay "BL" at 79.632,-9.67 h0.71; Top Overlay "MISO" at 86.363,-9.67 h0.71; Top Overlay "TCS" at 91.824,-9.67 h0.71; Top Overlay "MO" at 89.723,-3.284 h0.71; Top Overlay "MOSI" at 86.473,-3.284 h0.71; Top Overlay "CLK" at 91.723,-3.284 h0.71; Top Overlay "PEN" at 89.284,-9.67 h0.71; Top Overlay "D11" at 71.631,-9.67 h0.71; Top Overlay "GND" at 84.077,-9.67 h0.71; Top Overlay "GND" at 76.598,-3.284 h0.71; Top Overlay "RD" at 54.098,-3.284 h0.71; Top Overlay "D0" at 56.723,-3.284 h0.71; Top Overlay "D10" at 68.973,-3.284 h0.71; Top Overlay "VDD" at 79.098,-3.284 h0.71; Top Overlay "GND" at 81.598,-3.284 h0.71; Top Overlay "VDD" at 84.223,-3.284 h0.71; Top Overlay "VDD" at 81.664,-9.67 h0.71; Top Overlay "D15" at 76.711,-9.67 h0.71; Top Overlay "D12" at 71.598,-3.284 h0.71; Top Overlay "D9" at 69.218,-9.67 h0.71; Top Overlay "D8" at 66.473,-3.284 h0.71; Top Overlay "D6" at 64.348,-3.284 h0.71; Top Overlay "D5" at 64.265,-9.67 h0.71; Top Overlay "D4" at 61.723,-3.284 h0.71; Top Overlay "D3" at 61.725,-9.67 h0.71; Top Overlay "D2" at 59.223,-3.284 h0.71; Top Overlay "D1" at 59.312,-9.67 h0.71; Top Overlay "RST" at 56.264,-9.67 h0.71; Top Overlay "WR" at 54.105,-9.67 h0.71; Top Overlay "CS" at 51.565,-9.67 h0.71; Top Overlay "RS" at 51.598,-3.284 h0.71; Top Overlay "D14" at 74.098,-3.284 h0.71
U10: Top Overlay "1" at 18.892,-85.675 h0.71 r90